# Altium PCB mosfetSwitch.PcbDoc
Units mm, origin at the board's own origin, x right, y up, seen from the top; angles counter-clockwise.
Board outline 51 x 27 mm, 2 copper layers (Top Layer, Bottom Layer); 14 components, 7 nets, 34 pads, 36 vias.
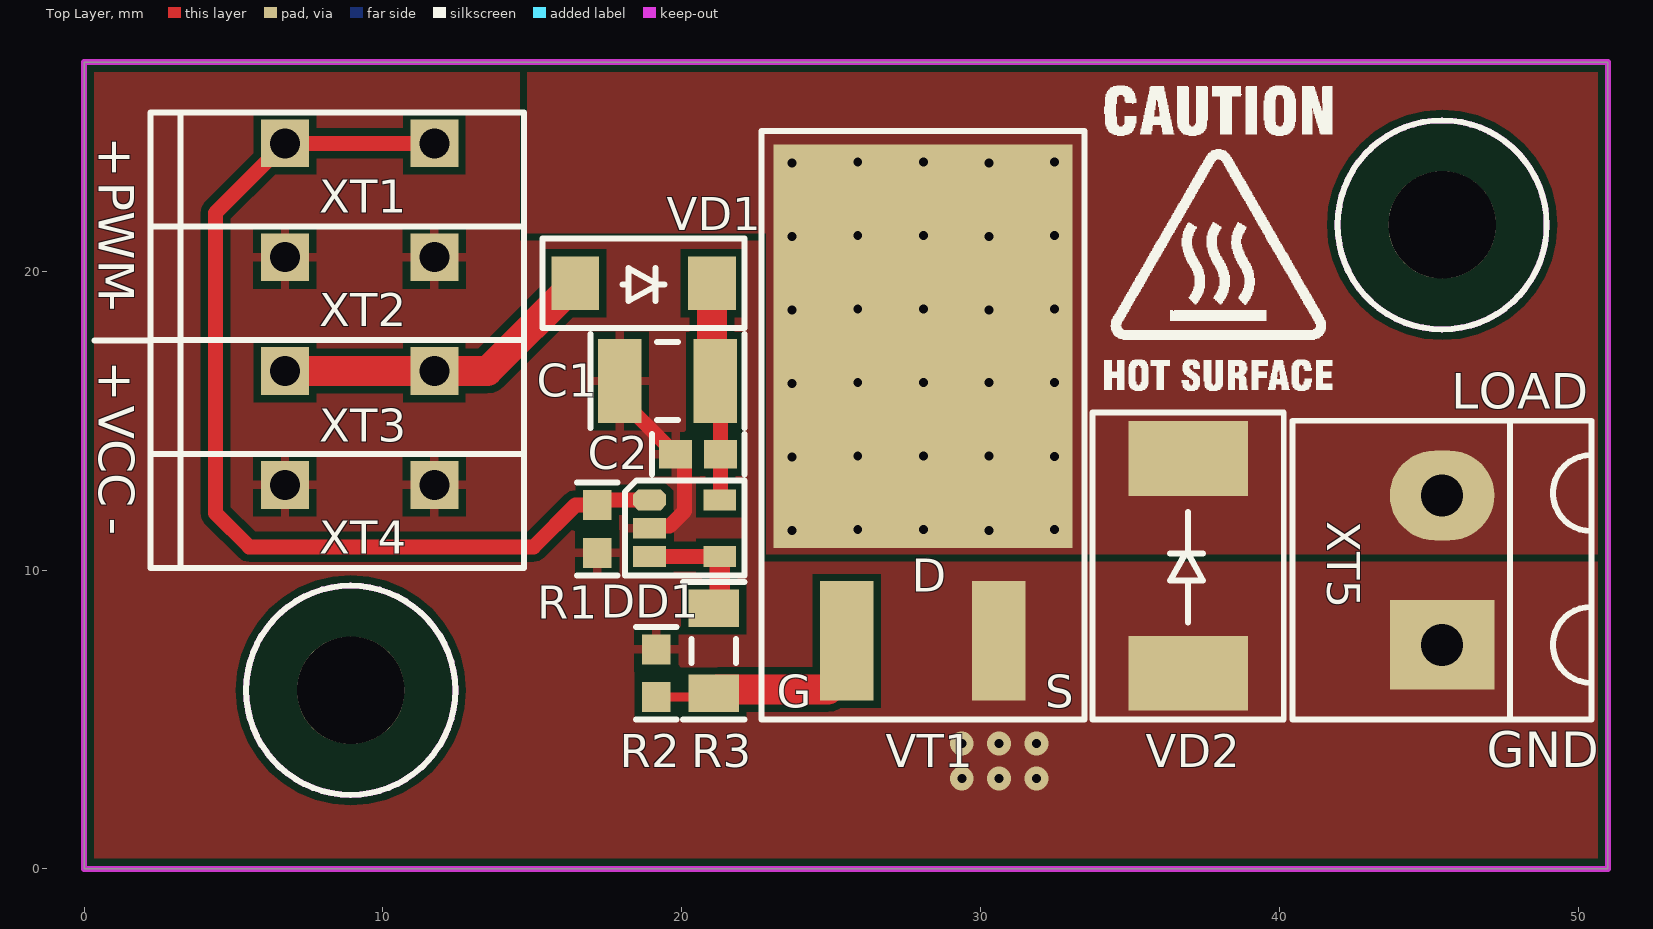
[diagram p0: Top Layer view]
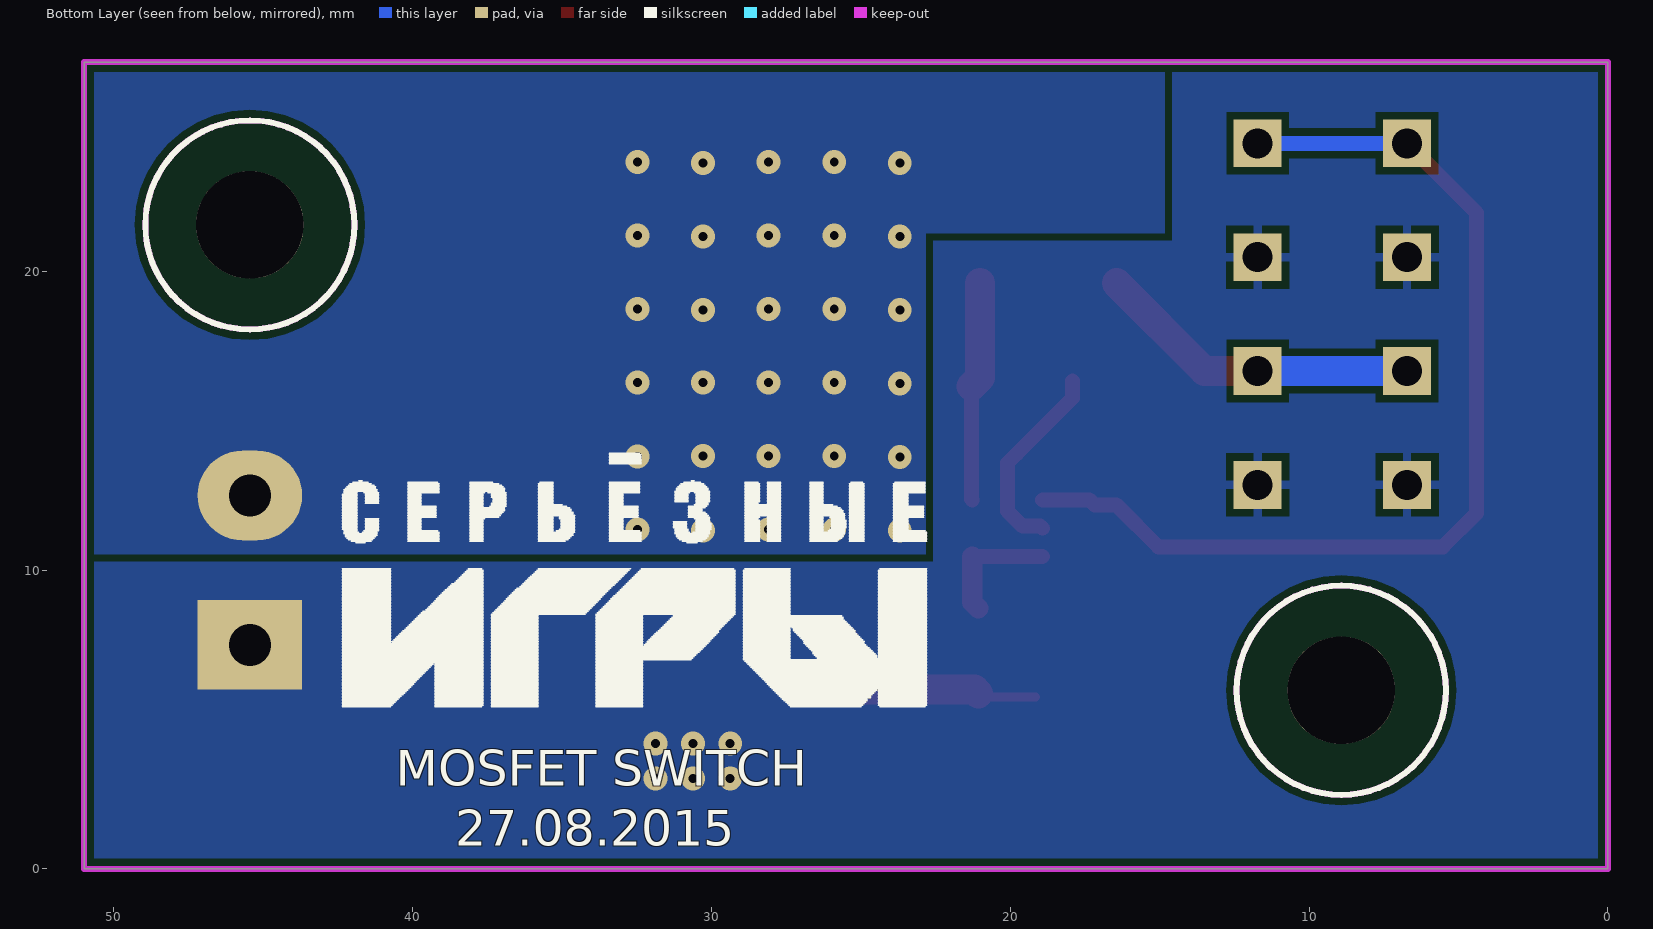
[diagram p1: Bottom Layer view, seen from below]
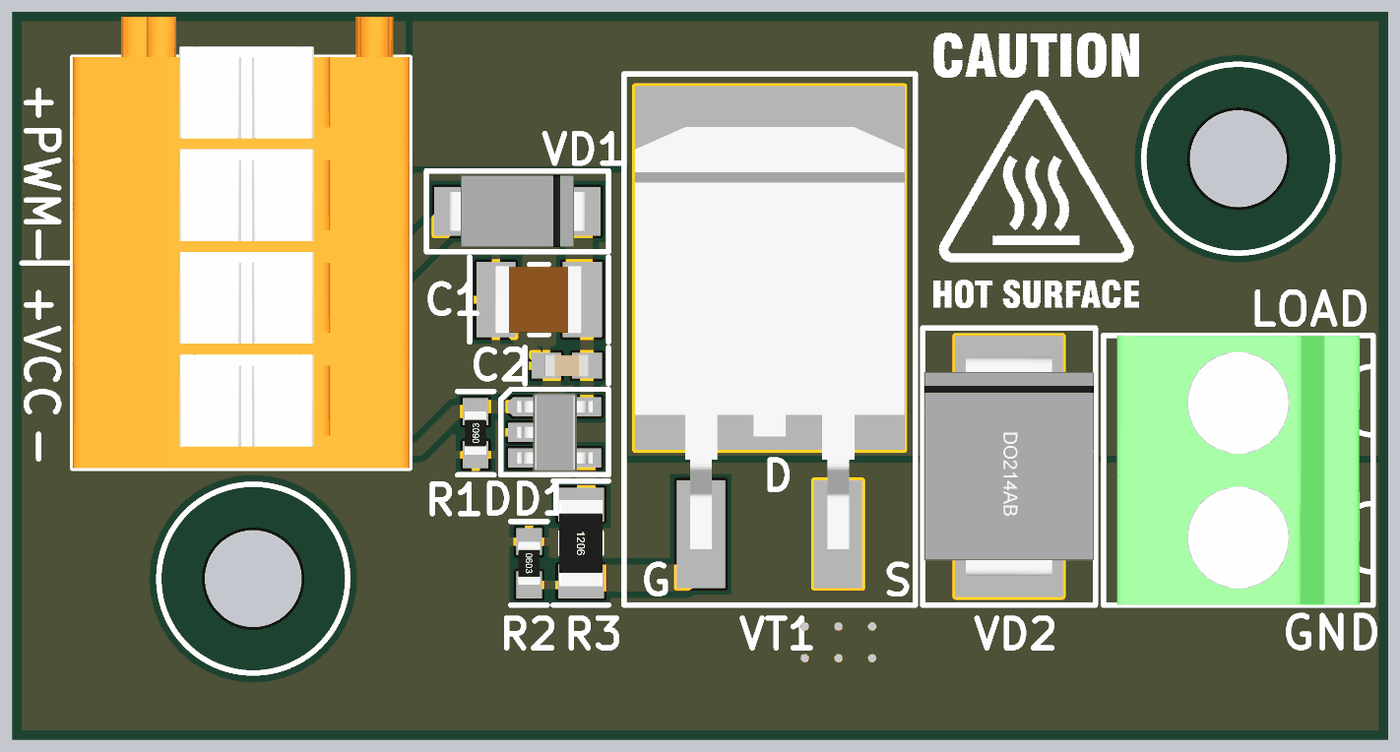
[diagram p2: 3D render of the assembled board from above, using the file's embedded part models]

## Layer stack, top to bottom
Top Solder: solder mask 0.0102, Solder Resist, Dk 3.5
Top Layer: signal copper 0.0356
Dielectric 1: dielectric 0.32, FR-4, Dk 4.8
Bottom Layer: signal copper 0.0356
Bottom Solder: solder mask 0.0102, Solder Resist, Dk 3.5

## Board outline
0,0 51,0 51,27 0,27

## Design rules (kind name [scope] priority, off if disabled: settings)
Clearance [All] p1: gap=0.24
ComponentClearance [All] p1 off: gap=0 collisioncheckmode=3 verticalgap=0.2 showdistances=FALSE
Height [All] p1: minheight=0 maxheight=50 prefheight=2
HoleSize [All] p1: absolutevalues=TRUE maxlimit=5 minlimit=0.3 maxpercent=80.000 minpercent=20.000
HoleToHoleClearance [All] p1: gap=0.2 allowstackedmicrovias=TRUE
MinimumSolderMaskSliver [All] p1: minsoldermaskwidth=0.1
PlaneClearance [All] p1: clearance=0.3
PlaneConnect PlaneConnect_VIA [IsVia] p1: planeconnectstyle=Direct reliefexpansion=0.508 reliefentries=4 reliefconductorwidth=0.254 reliefairgap=0.254
PlaneConnect PlaneConnect_PAD [All] p2: planeconnectstyle=Relief reliefexpansion=0.5 reliefentries=4 reliefconductorwidth=0.3 reliefairgap=0.2
PolygonConnect PolygonConnect_MOSFET [InComponentClass('MOSFET') vs InNet('NetVD2_2')] p1: connectstyle=Direct reliefconductorwidth=1 reliefentries=4 polygonreliefangle="90 Angle" airgapwidth=0.254
PolygonConnect PolygonConnect_MOSFET_GND [InComponentClass('MOSFET') vs InNet('GND')] p2: connectstyle=Direct reliefconductorwidth=1 reliefentries=4 polygonreliefangle="90 Angle" airgapwidth=0.254
PolygonConnect PolygonConnect_VIA [IsVia] p3: connectstyle=Direct reliefconductorwidth=0.254 reliefentries=4 polygonreliefangle="90 Angle" airgapwidth=0.254
PolygonConnect PolygonConnect_PAD [All] p4: connectstyle=Relief reliefconductorwidth=0.3 reliefentries=4 polygonreliefangle="90 Angle" airgapwidth=0.254
RoomDefinition mosfetSwitch [InComponentClass('mosfetSwitch')] p1: confinementstyle=ConfineIn formatcopy=TRUE lockcomponents=FALSE outline 0,0 50.625,0 50.625,27 0,27
RoutingCorners [All] p1: cornerstyle=45-Degree minsetback=2 maxsetback=2
RoutingVias [All] p1: holewidth=0.3 width=0.8 viastyle="Through Hole" minholewidth=0.3 minwidth=0.8 maxholewidth=0.3 maxwidth=0.8
SilkToSilkClearance [All] p1: silktosilkclearance=0.2
SilkToSolderMaskClearance SilkscreenOverComponentPads [IsPad] p1: minsilkscreentomaskgap=0.2 clearancetoexposedcopper=TRUE
SolderMaskExpansion [All] p1: expansion=0.1
Width [All] p1: maxlimit=5 minlimit=0.25 preferedwidth=0.25 minimp=50.000000 maximp=50.000000 favimp=50.000000
19 further rules are at their usual default settings.

## Classes and differential pairs
component class MOSFET: VD2 VT1 XT5

## Components (designator, comment, footprint, x,y, rotation, side; value= is the part's Value field where it differs from the comment)
C1 "C_1210" 1210_CAP 19.525,16.325 r0 top
C2 "C_0603" 0603_CAP 20.55,13.875 r0 top
DD1 "IRS44273LTRPBF" SOT-23-5 18.975,12.35 r270 top
R1 "R_0603" 0603_RES 17.175,11.373 r90 top
R2 "R_0603" 0603_RES 19.15,6.545 r270 top
R3 "R_1206" 1206_RES 21.075,7.295 r270 top
VD1 "SR24" SMA 18.725,19.6 r0 top
VD2 "SK59" SMC 36.95,10.138 r90 top
VT1 "AUIRFZ44NS" D2PACK_TO263 25.525,7.625 r0 top
XT1 "235-101" wago235-101 9.225,24.28 r270 top
XT2 "235-101" wago235-101 9.225,20.47 r270 top
XT3 "235-101" wago235-101 9.225,16.66 r270 top
XT4 "235-101" wago235-101 9.225,12.85 r270 top
XT5 "DG500-02P" DG500-02P 45.45,7.495 r90 top

## Footprints (in the part's own frame and the unit in brackets; to place one, negate y for a bottom-side part, rotate by r counter-clockwise, add the part's x,y. Pads: shape width x height; smd on the part's side, far side on the other; paste and mask are expansions set on the pad)
0603_CAP [mm] "Chip Capacitor, 2-Leads, Body 1,60x0,80mm, IPC Medium Density"
  rect 1.1x0.95 smd: 1(-0.75,0) 2(0.75,0)
  silkscreen extent -1.55,-0.67 1.55,0.67, body extent -0.8,-0.4 0.8,0.4, height 0.8
0603_RES [mm] "Chip Resistor, 2-Leads, Body 1,60x0,80mm, IPC Medium Density"
  rect 1x0.95 smd: 1(-0.8,0) 2(0.8,0)
  silkscreen extent -1.55,-0.67 1.55,0.68, body extent -0.8,-0.4 0.8,0.4, height 0.45
1206_RES [mm] "Chip Resistor, 2-Leads, Body 3,10x1,55mm, IPC Medium Density"
  rect 1.25x1.7 smd: 1(-1.425,0) 2(1.425,0)
  silkscreen extent -2.3,-1.02 2.3,1.02, body extent -1.6,-0.8 1.6,0.8, height 0.6
1210_CAP [mm] "Chip Capacitor, 2-Leads, Body 3,20x2,50mm, IPC Medium Density"
  rect 1.45x2.8 smd: 1(-1.6,0) 2(1.6,0)
  silkscreen extent -2.58,-1.58 2.58,1.58, body extent -1.63,-1.25 1.57,1.25, height 2.5
D2PACK_TO263 [mm]
  rect 1.8x4 smd: 1(0,0) 2(5.09,0)
  rect 10x13.5 smd: 3(2.55,9.87)
  silkscreen extent -2.85,-2.63 7.95,17.07, body extent -2.45,-0.57 7.55,15.11, height 4.93
DG500-02P [mm] "Screw terminal block pitch 5.00 x 2"
  rect 3x3.5 hole 1.4: 1(0,0)
  oval 3x3.5 hole 1.4: 2(5,0)
  silkscreen extent -2.5,-5 7.5,5, body extent -2.5,-4.5 7.5,4.5, height 14.05
SMA [mm]
  rect 1.6x1.8 smd: 1(-2.286,0) 2(2.286,0)
  silkscreen extent -3.37,-1.5 3.37,1.5, body extent -2.56,-1.33 2.55,1.33, height 2.12
SMC [mm]
  rect 2.5x4 smd: 1(-3.593,0) 2(3.593,0)
  silkscreen extent -5.14,-3.2 5.13,3.2, body extent -4.06,-3.15 4.07,3.15, height 2.67
SOT-23-5 [mm]
  oct 0.7x1.1 smd: 1(0,-0.05)
  rect 0.7x1.1 smd: 2(0.952,-0.05) 3(1.9,-0.05) 4(1.9,2.3) 5(0,2.3)
  silkscreen extent -0.65,-0.87 2.53,3.13, body extent -0.5,-0.26 2.4,2.54, height 1.07
wago235-101 [mm] "1-conductor PCB terminal strip; 2 solder pins/pole; 2-pole; pin spacing 3.81 mm / 0.15 in; with push-button"
  rect 1.6x1.6 hole 1: 1(0,2.5) 1(0,-2.5)
  silkscreen extent -1.03,-7 2.78,5.5, body extent -2.53,-7 2.78,5.5, height 15.5

## Part data
C1: "Конденсатор (1210)"
C2: "Конденсатор (0603)"
DD1: "Single Low-Side Driver IC"
R1 R2: "Резистор 0.063 Вт (0603)"
R3: "Резистор 0.25 Вт (1206)"
VD1: "Диод Шоттки 2А"
VD2: "Диод Шоттки 5А"
VT1: "N-chanal Power MOSFET"
XT1 XT2 XT3 XT4: library part wago235-101, "235-101 - 1-CONDUCTOR PCB TERMINAL BLOCK 2 SOLDER PINS / POLE 1 POLE PIN SPACING 3.81 MM / 0.15 IN WITH PUSH BOTTONS"
XT5: "Terminal block; angled 90; 2.5mm2; 5mm; ways: 2; 24A; 250V; L:15mm"

## Free pads (board coordinates)
  round 3.6 hole 3.6 unplated: 0(8.925,5.975) 0(45.45,21.55)

## Via types
v1: diameter 0.8, hole 0.3, Top Layer to Bottom Layer, tented bottom, 30 vias
v2: diameter 0.8, hole 0.3, Top Layer to Bottom Layer, tented both sides, 6 vias

## Nets (pads, with @x,y where several pads share a name; then routed paths per layer and width w, separated by ;. In a path a pad name is that pad's centre, name@x,y a point inside that pad or via, vN(x,y) a via of type N, cw(c..) or ccw(c..) an arc to the next point about the centre after c; other vN are vias at no path point)
GND: C1.1 C2.1 DD1.2 R1.1 R2.1 VD2.1 VT1.2 XT2.1 XT4.1 XT5.1 | length 6.7
  Top Layer w0.5: C1.1 17.925,15.75 C2.1 20.1,13.575 20.1,11.975 19.6,11.475 19.002,11.475 DD1.2
  other v2: 29.375,3.025 30.625,3.025 31.875,3.025 29.375,4.2 30.625,4.2 31.875,4.2
NetC1_2: C1.2 C2.2 DD1.5 VD1.2 | length 7.4
  Top Layer w0.5: DD1.5 21.3,12.375 C2.2 C1.2@21.3,16.15
  Top Layer w1: VD1.2 21.011,16.439 C1.2 C1.2@21.3,16.15
NetDD1_1: DD1.1 R1.2 XT1.1 | length 39
  Top Layer w0.5: XT1.1@11.725,24.28 6.725,24.28 4.4,21.955 4.4,11.9 5.525,10.775 15.05,10.775 16.448,12.173 R1.2 17.352,12.35 DD1.1
  Bottom Layer w0.5: XT1.1@6.725,24.28 XT1.1@11.725,24.28
NetDD1_3: DD1.3 DD1.4 R3.1 | length 4.2
  Top Layer w0.5: DD1.3 DD1.4
  Top Layer w0.68: R3.1 21.275,8.92 DD1.4
NetR2_2: R2.2 R3.2 VT1.1 | length 7.7
  Top Layer w0.3: R2.2 20.95,5.745 R3.2
  Top Layer w1: R3.2 21.205,6 24.9,6 25.525,6.625 VT1.1
NetVD1_1: VD1.1 XT3.1 | length 15.9
  Top Layer w1: XT3.1@6.725,16.66 11.725,16.66 13.499,16.66 VD1.1
  Bottom Layer w1: XT3.1@6.725,16.66 XT3.1@11.725,16.66
NetVD2_2: VD2.2 VT1.3 XT5.2
  other v1: 23.7,11.325 30.281,11.325 25.894,11.35 28.088,11.35 32.475,11.35 23.7,13.785 25.894,13.81 28.088,13.81 30.281,13.81 32.475,13.8 23.7,16.245 25.894,16.27 28.088,16.27 30.281,16.27 32.475,16.27 23.7,18.705 30.281,18.705 25.894,18.73 28.088,18.73 32.475,18.73 23.7,21.165 30.281,21.165 25.894,21.19 28.088,21.19 32.475,21.19 23.7,23.625 25.894,23.65 28.088,23.65 30.281,23.625 32.475,23.65

## Polygon pours and split planes (outlines as drawn)
NetVD2_2 on Bottom Layer "Bottom Layer-No Net" (solid, remove dead copper, pour order 5): 22.825,10.525 22.825,21.275 14.825,21.275 14.825,27 51,27 51,10.525
GND on Bottom Layer "Bottom Layer-No Net" (solid, remove dead copper, pour order 8): 14.575,27 0,27 0,0 51,0 51,10.275 22.575,10.275 22.575,21.025 14.575,21.025
NetVD2_2 on Top Layer "Bottom Layer-No Net" (solid, remove dead copper, pour order 6): 22.825,10.525 22.825,21.275 14.825,21.275 14.825,27 51,27 51,10.525
GND on Top Layer "Bottom Layer-No Net" (solid, remove dead copper, pour order 7): 14.575,27 0,27 0,0 51,0 51,10.275 22.575,10.275 22.575,21.025 14.575,21.025

## Keep-outs
Keep-Out Layer:
  circle w0.2: c45.45,21.55 r3.5
  circle w0.2: c8.925,5.975 r3.5
  lines w0.2: 0,0 0,27 51,27 51,0 0,0

## Silkscreen, mask and mechanical layers (free items; w line width, h text height)
Top Overlay:
  drawing of 2065 lines, arcs and shapes, not listed
  text "+" at 0.5,24.5 h1.2 r270
  text "PWM" at 0.5,23 h1.2 r270
  text "-" at 0.5,19.25 h1.2 r270
  text "+" at 0.5,17 h1.2 r270
  text "VCC" at 0.5,15.5 h1.2 r270
  text "LOAD" at 45.75,15.4 h1.2
  text "-" at 0.5,11.75 h1.2 r270
  text "GND" at 46.95,3.4 h1.2
Bottom Overlay:
  drawing of 1067 lines, arcs and shapes, not listed
  text "MOSFET SWITCH" at 40.576,2.775 h1.2
  text "27.08.2015" at 38.576,0.775 h1.2

## Text inside footprints (layer, text, board x,y; h text height)
VT1: Top Overlay "G" at 23.175,5.395 h1.1; Top Overlay "S" at 32.175,5.395 h1.1; Top Overlay "D" at 27.7,9.27 h1.1